# Altium PCB STM32F103_Blue_Pill_V_2.PcbDoc
Units mm, origin at the board's own origin, x right, y up, seen from the top; angles counter-clockwise.
Board outline 53.34 x 22.86 mm, 2 copper layers (Top Layer, Bottom Layer); 33 components, 50 nets, 164 pads, 28 vias.
Unrouted connection lines stored in the file: 25.
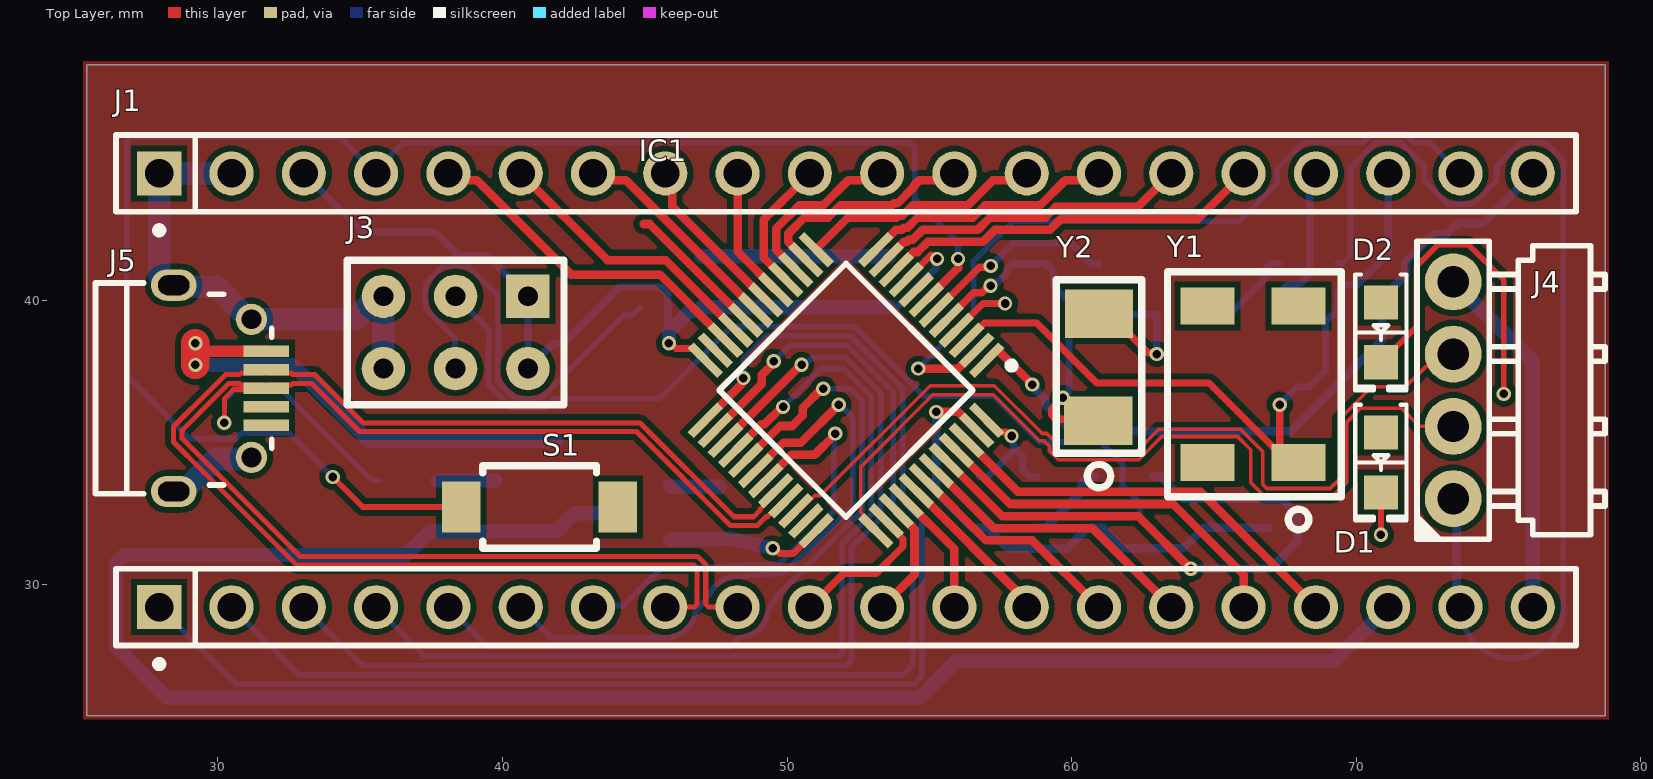
[diagram p0: Top Layer view]
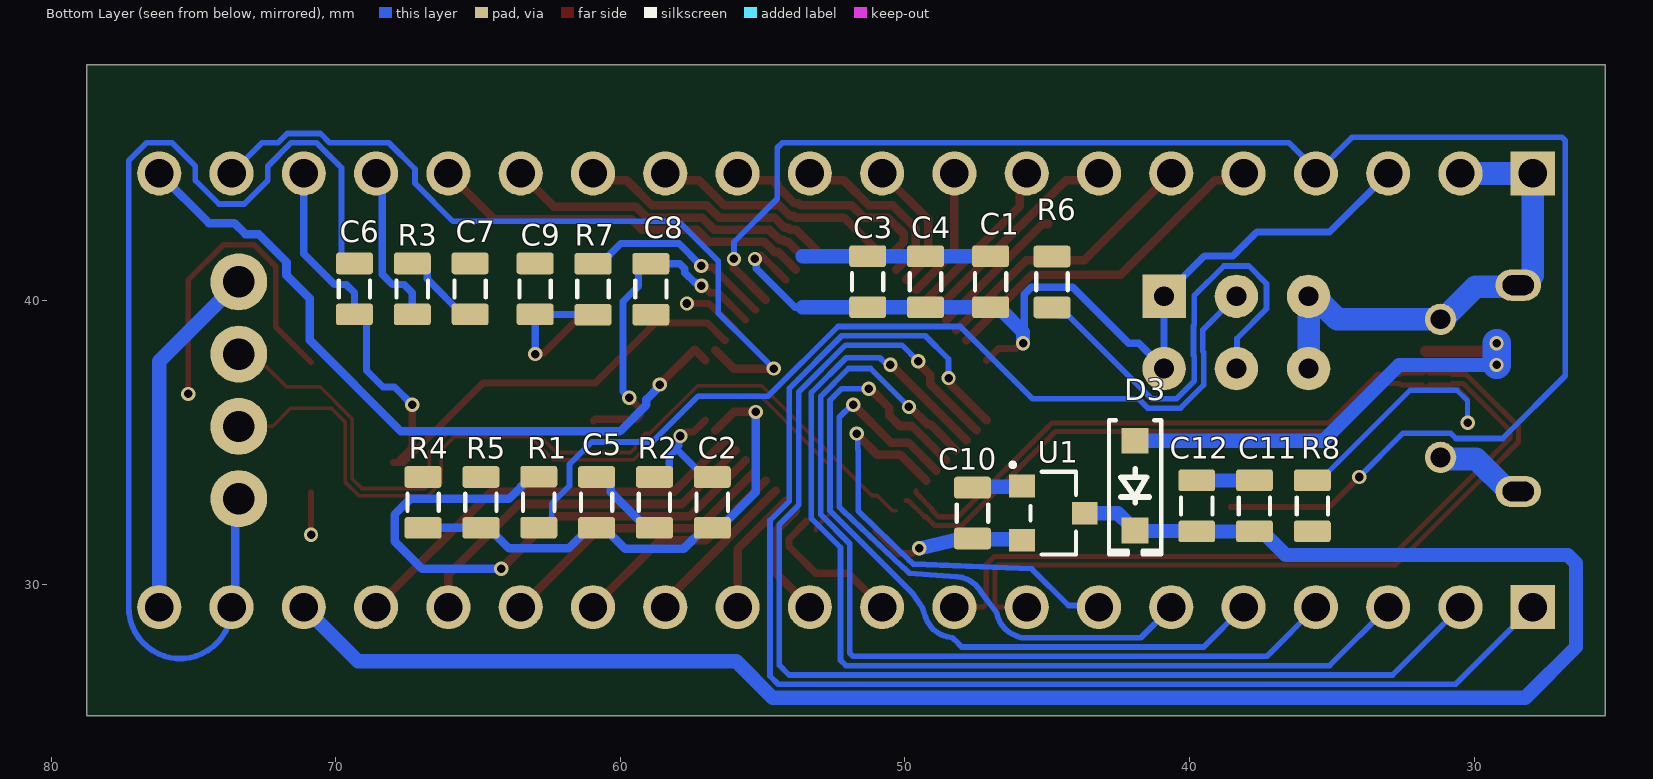
[diagram p1: Bottom Layer view, seen from below]
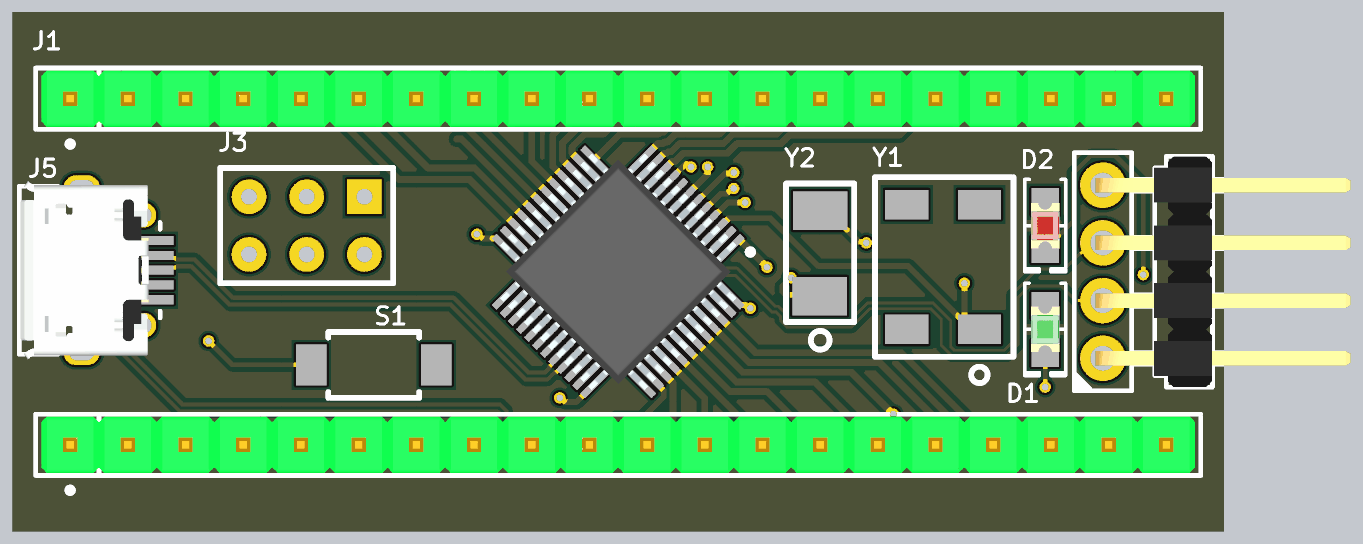
[diagram p2: 3D render of the assembled board from above, using the file's embedded part models]
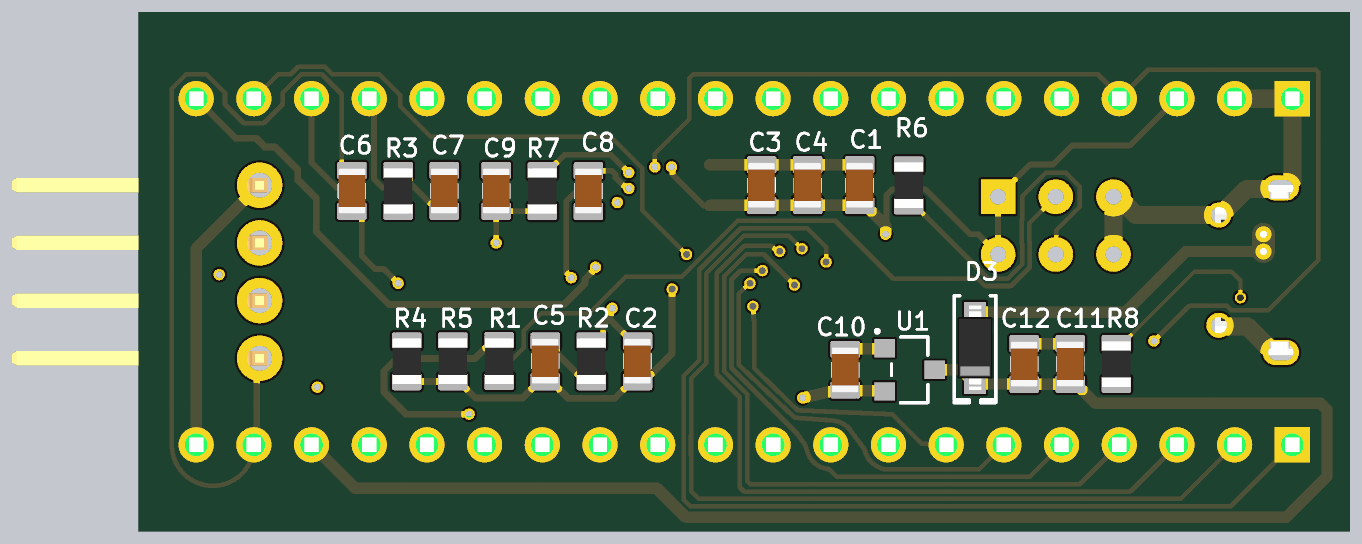
[diagram p3: 3D render of the assembled board from below, using the file's embedded part models]

## Layer stack, top to bottom
Top Solder: solder mask 0.0102, Solder Resist, Dk 3.5
Top Layer: signal copper 0.0356
Dielectric 1: dielectric 0.32, FR-4, Dk 4.8
Bottom Layer: signal copper 0.0356
Bottom Solder: solder mask 0.0102, Solder Resist, Dk 3.5

## Board outline
25.4,25.4 25.4,48.26 78.74,48.26 78.74,25.4

## Design rules (kind name [scope] priority, off if disabled: settings)
Clearance Clearance_1 [OnMid vs OnMid] p1: gap=0.2 ignorepadtopadclearanceinfootprint=FALSE except(0.127: Arc-Arc Arc-Track Arc-Text Track-Track Track-Text Text-Text) sourcerule=39 cellrowname=All cellrowtype=0 cellcolname=All cellcoltype=0 innerlayers=TRUE
Clearance Clearance_2 [(ExistsOnLayer('Top Layer') Or ExistsOnLayer('Bottom Layer')) vs (ExistsOnLayer('Top Layer') Or ExistsOnLayer('Bottom Layer'))] p2: gap=0.2 ignorepadtopadclearanceinfootprint=FALSE except(0.127: Arc-Arc Arc-Track Arc-Text Track-Track Track-Text Text-Text) sourcerule=39 cellrowname=All cellrowtype=0 cellcolname=All cellcoltype=0 outerlayers=TRUE
Clearance [All] p3: gap=0.254 ignorepadtopadclearanceinfootprint=FALSE ismatrix=TRUE
DiffPairsRouting DiffPair_90DiffPairsRouting [InDifferentialPair('USB_DiffPair_90')] p1: maxlimit=0.127 minlimit=0.127 mostfreqgap=0.127 toplayer_minwidth=0.178 toplayer_maxwidth=0.178 toplayer_prefwidth=0.178 bottomlayer_minwidth=0.178 bottomlayer_maxwidth=0.178 bottomlayer_prefwidth=0.178 impedanceprofiledriven=TRUE impedanceprofileid={32B7627D-B66E-4A8D-A1D5-BE67BC07B4AD} impedanceprofilevalue=90.000000 maxuncoupledlength=12.7
DiffPairsRouting [All] p2: maxlimit=0.254 minlimit=0.254 mostfreqgap=0.254 toplayer_minwidth=0.381 toplayer_maxwidth=0.381 toplayer_prefwidth=0.381 bottomlayer_minwidth=0.381 bottomlayer_maxwidth=0.381 bottomlayer_prefwidth=0.381 maxuncoupledlength=12.7
MatchedLengths DiffPair_90MatchedLengths [InDifferentialPair ('USB_DiffPair_90')] p1: tolerance=25.4 checknetsindiffpair=FALSE checkdiffpairvsdiffpair=TRUE checkxsignals=TRUE checkothers=TRUE
MinimumSolderMaskSliver [All] p1: minsoldermaskwidth=0.15
PlaneConnect [All] p1: planeconnectstyle=Direct reliefexpansion=0.508 reliefentries=4 reliefconductorwidth=0.254 reliefairgap=0.254
PolygonConnect [All] p1: connectstyle=Relief reliefconductorwidth=0.254 reliefentries=4 polygonreliefangle="90 Angle" airgapwidth=0.254
RoutingVias [All] p1: holewidth=0.711 width=1.27 viastyle="Through Hole" minholewidth=0.711 minwidth=1.27 maxholewidth=0.711 maxwidth=1.27
RoutingVias RoutingVia_JLCPCB [All] p2: holewidth=0.3 width=0.5 viastyle="Through Hole" minholewidth=0.3 minwidth=0.5 maxholewidth=6.3 maxwidth=6.5
SilkToSilkClearance [All] p1: silktosilkclearance=0.15
SilkToSolderMaskClearance [IsPad] p1: minsilkscreentomaskgap=0.15 clearancetoexposedcopper=TRUE
SolderMaskExpansion [All] p1: expansion=0.102 istentingtop=FALSE
UnRoutedNet [All] p1: checkbadconnections=TRUE
Width MaxMinWidth_JLCPCB [All] p1: maxlimit=10 minlimit=0.127 preferedwidth=0.2 minimp=50.000000 maximp=50.000000 favimp=50.000000
24 further rules are at their usual default settings.

## Classes and differential pairs
component class Controller_page: C1 C2 C3 C4 C5 C6 C7 C8 C9 C10 C11 C12 D1 D2 D3 IC1 R1 R2 R3 R4 R5 R6 R7 S1 U1 Y1 Y2
component class Connector_page: "  " J1 J3 J4 J5 R8
differential pair USB_DiffPair_90: +USB_D_P -USB_D_N

## Components (designator, comment, footprint, x,y, rotation, side; value= is the part's Value field where it differs from the comment)
C1 "Capacitor 4.7µF +/-40% 25V 0805" CAPC0805(2012)145_L 46.99,40.64 r270 bottom value=104
C2 "Capacitor 4.7µF +/-40% 25V 0805" CAPC0805(2012)145_L 56.769,32.893 r90 bottom value=1uF
C3 "Capacitor 4.7µF +/-40% 25V 0805" CAPC0805(2012)145_L 51.308,40.64 r270 bottom value=104
C4 "Capacitor 4.7µF +/-40% 25V 0805" CAPC0805(2012)145_L 49.276,40.64 r270 bottom value=104
C5 "Capacitor 4.7µF +/-40% 25V 0805" CAPC0805(2012)145_L 60.833,32.893 r90 bottom value=104
C6 "Capacitor 4.7µF +/-40% 25V 0805" CAPC0805(2012)145_L 69.342,40.386 r270 bottom value=15pF
C7 "Capacitor 4.7µF +/-40% 25V 0805" CAPC0805(2012)145_L 65.278,40.386 r270 bottom value=15pF
C8 "Capacitor 4.7µF +/-40% 25V 0805" CAPC0805(2012)145_L 58.928,40.386 r90 bottom value=15pF
C9 "Capacitor 4.7µF +/-40% 25V 0805" CAPC0805(2012)145_L 62.992,40.386 r270 bottom value=15pF
C10 "Capacitor 4.7µF +/-40% 25V 0805" CAPC0805(2012)145_L 47.625,32.512 r270 bottom value=0.1uF
C11 "Capacitor 4.7µF +/-40% 25V 0805" CAPC0805(2012)145_L 39.746,32.762 r270 bottom value=104
C12 "Capacitor 4.7µF +/-40% 25V 0805" CAPC0805(2012)145_L 37.719,32.766 r270 bottom value=104
D1 "Power Supply" "LED 0805_2012 GREEN" 70.866,34.29 r270 top value=Green
D2 "Test" "LED 0805_2012 RED" 70.866,38.862 r270 top value=Red
D3 "Zener 3V3" SOD-123 41.91,33.477 r270 bottom
IC1 "STM32F103C8T6XXX" QFP50P900X900X160-48N 52.07,36.83 r225 top
J1 "2-826646-0" FP-2-826646-0-MFG 52.07,44.45 r0 top
J3 "2x3P" "2x3P 2.54mm Pin Header -Footprint-1" 40.894,40.132 r180 top
J4 "M20-9960445" "HARWIN M20-9960445" 73.406,36.83 r90 top
J5 "MICROXNJ USB 2.0" "USB 2.0 Tupe B Micro" 28.498,36.899 r90 top
R1 "470R5J" RESC0805(2012)_L 62.865,32.893 r270 bottom value=10K
R2 "470R5J" RESC0805(2012)_L 58.801,32.893 r90 bottom value=10K
R3 "470R5J" RESC0805(2012)_L 67.31,40.386 r270 bottom value=47
R4 "470R5J" RESC0805(2012)_L 66.929,32.893 r90 bottom value=1K
R5 "470R5J" RESC0805(2012)_L 64.897,32.893 r90 bottom value=1K
R6 "470R5J" RESC0805(2012)_L 44.831,40.64 r90 bottom value=10K
R7 "470R5J" RESC0805(2012)_L 60.96,40.386 r90 bottom value=47
R8 "470R5J" RESC0805(2012)_L 35.687,32.766 r270 bottom value=1.5K
S1 "TS-1088-AR02016" TS-1088-AR02016-Footprint-1 41.306,32.729 r180 top
U1 "XC6206P332MR" XC6206P332MR-Footprint-1 44.788,32.512 r270 bottom
Y1 "MC-30632.7680K-A0:ROHS" MC-30632.7680K-A0:ROHS-Footprint-1 67.97,34.29 r90 top
Y2 "X50328MSB2GI" X50328MSB2GI-Footprint-1 60.96,35.814 r90 top
? "2-826646-0" FP-2-826646-0-MFG 52.07,29.21 r0 top

## Footprints (in the part's own frame and the unit in brackets; to place one, negate y for a bottom-side part, rotate by r counter-clockwise, add the part's x,y. Pads: shape width x height; smd on the part's side, far side on the other; paste and mask are expansions set on the pad)
"2x3P 2.54mm Pin Header -Footprint-1" [mil]
  rect 60x60 hole 27.56: 1(0,0)
  round 60 hole 27.56: 2(0,100) 3(100,0) 4(100,100) 5(200,0) 6(200,100)
  silkscreen extent -50,-50 250,150
CAPC0805(2012)145_L [mm] "Chip Capacitor, Body 2.0x1.2mm, Height 1.45mm, IPC High Density"
  rrect25% 0.76x1.3 smd: 1(-0.9,0) 2(0.89,0)
  silkscreen extent -0.3,-0.55 0.3,0.55, body extent -1,-0.6 1,0.6, height 1.45
FP-2-826646-0-MFG [mm]
  rect 1.55x1.55 hole 1 paste-2539.97 mask+0: 1(-24.13,0)
  round 1.55 hole 1 paste-2539.97 mask+0: 2(-21.59,0) 3(-19.05,0) 4(-16.51,0) 5(-13.97,0) 6(-11.43,0) 7(-8.89,0) 8(-6.35,0) 9(-3.81,0) 10(-1.27,0) 11(1.27,0) 12(3.81,0) 13(6.35,0) 14(8.89,0) 15(11.43,0) 16(13.97,0) 17(16.51,0) 18(19.05,0) 19(21.59,0) 20(24.13,0)
  silkscreen extent -25.65,-2.12 25.65,1.35, body extent -25.75,-1.45 25.75,1.45, height 0.25
"HARWIN M20-9960445" [mm] "2.54mm DIL PC TAIL PIN HEADER ASSEMBLY"
  round 2 hole 1.1: 1(-3.81,0) 2(-1.27,0) 3(1.27,0) 4(3.81,0)
  silkscreen extent -5.24,-5.33 5.24,1.3, body extent -5.08,-10.9 5.08,0.32, height 2.54
"LED 0805_2012 GREEN" [mm] "Chip Diode, 2-Leads, Body 2.00x1.25mm, IPC Medium Density"
  rect 1.2x1.2 smd: 1(-1.05,0) 2(1.05,0)
  silkscreen extent -2.03,-0.9 2.03,0.9, body extent -1,-0.63 1,0.63, height 0.9
"LED 0805_2012 RED" [mm] "Chip Diode, 2-Leads, Body 2.00x1.25mm, IPC Medium Density"
  rect 1.2x1.2 smd: 1(-1.05,0) 2(1.05,0)
  silkscreen extent -2.03,-0.9 2.03,0.9, body extent -1,-0.63 1,0.63, height 0.9
MC-30632.7680K-A0:ROHS-Footprint-1 [mm]
  rect 1.3x1.9 smd: 1(0,0) 2(5.5,0) 3(5.5,3.2) 4(0,3.2)
  silkscreen extent -2.36,-1.5 6.7,4.6, body extent -1,-1.3 6.5,4.4, height 1.2
QFP50P900X900X160-48N [mm]
  rect 1.475x0.3 smd: 1(-4.238,2.75) 2(-4.238,2.25) 3(-4.238,1.75) 4(-4.238,1.25) 5(-4.238,0.75) 6(-4.238,0.25) 7(-4.238,-0.25) 8(-4.238,-0.75) 9(-4.238,-1.25) 10(-4.238,-1.75) 11(-4.238,-2.25) 12(-4.238,-2.75) 25(4.238,-2.75) 26(4.238,-2.25) 27(4.238,-1.75) 28(4.238,-1.25) 29(4.238,-0.75) 30(4.238,-0.25) 31(4.238,0.25) 32(4.238,0.75) 33(4.238,1.25) 34(4.238,1.75) 35(4.238,2.25) 36(4.238,2.75)
  rect 0.3x1.475 smd: 13(-2.75,-4.238) 14(-2.25,-4.238) 15(-1.75,-4.238) 16(-1.25,-4.238) 17(-0.75,-4.238) 18(-0.25,-4.238) 19(0.25,-4.238) 20(0.75,-4.238) 21(1.25,-4.238) 22(1.75,-4.238) 23(2.25,-4.238) 24(2.75,-4.238) 37(2.75,4.238) 38(2.25,4.238) 39(1.75,4.238) 40(1.25,4.238) 41(0.75,4.238) 42(0.25,4.238) 43(-0.25,4.238) 44(-0.75,4.238) 45(-1.25,4.238) 46(-1.75,4.238) 47(-2.25,4.238) 48(-2.75,4.238)
  silkscreen extent -4.85,-3.15 3.15,3.62, body extent -4.5,-4.5 4.5,4.5, height 1.6
RESC0805(2012)_L [mm] "Chip Resistor, Body 2.0x1.3mm, IPC High Density"
  rrect25% 0.76x1.3 smd: 1(-0.9,0) 2(0.89,0)
  silkscreen extent -0.3,-0.55 0.3,0.55, body extent -1,-0.62 1,0.63, height 0.6
SOD-123 [mm] "SOD, 2-Leads, Body 1.55x3.70mm, IPC Medium Density"
  rect 0.9x0.95 smd: 1(-1.575,0) 2(1.575,0)
  silkscreen extent -2.3,-0.92 2.41,0.92, body extent -1.86,-0.78 1.86,0.77, height 1.35
TS-1088-AR02016-Footprint-1 [mm]
  rect 1.35x1.8 smd: 1(-2.75,0) 2(2.75,0)
  silkscreen extent -2,-1.45 2,1.45, body extent -2,-1.5 2,1.44, height 2.5
"USB 2.0 Tupe B Micro" [mm] "USB 2.0 Type B Micro"
  rect 0.4x1.6 smd: 1(1.3,-3.2) 2(0.65,-3.2) 3(0,-3.2) 4(-0.65,-3.2) 5(-1.3,-3.2)
  round 1.1 hole 0.7: 6(-2.425,-2.68) 9(2.425,-2.68)
  oval 1.1x1.6 hole 0.7 slot 1.1 at 90 deg: 7(-3.625,0.05) 8(3.625,0.05)
  silkscreen extent -3.7,-3.4 3.7,2.8, body extent -3.93,-2.9 3.93,2.76, height 2.78
X50328MSB2GI-Footprint-1 [mm]
  rect 1.7x2.4 smd: 1(-0.056,0.022) 2(3.7,0)
  silkscreen extent -2.41,-1.5 4.9,1.5, body extent -1.2,-1.5 4.9,1.5, height 1.2
XC6206P332MR-Footprint-1 [mm]
  rect 0.8x0.9 smd: 1(-0.95,-1.1) 2(0.95,-1.1) 3(0,1.1)
  silkscreen extent -1.77,-1.5 1.45,0.8, body extent -1.45,-0.82 1.45,0.8, height 1.2

## Part data
C1 C2 C3 C4 C5 C6 C7 C8 C9 C10 C11 C12: library part CMP-001-00080-4, "Chip Capacitor, 4.7µF +/-40%, 25V, 0805, Thickness 1.45 mm", Case/Package=0805, Max Operating Temperature=85°C, Min Operating Temperature=-55°C, Tolerance=20%, Voltage Rating=25V, Mounting Technology=SMT, Pins=2
D1: library part APHCM2012CGCK-F01, "LED GREEN CLEAR CHIP SMD", Color=Green, Current - Test=20mA, Device Package="0805 (2012 Metric)", Lens Color=Colorless, Manufacturer=Kingbright, Millicandela Rating=50mcd, Supplier Device Package="Chip LED", Supplier Part Number 1=754-1094-1-ND, Voltage - Forward (Vf) (Typ)=2.1V, ComponentLink1Description=Datasheet, ComponentLink1URL=http://www.kingbrightusa.com/images/catalog/SPEC/APHCM2012CGCK-F01.pdf, ComponentLink2Description="DigiKey Link", ComponentLink2URL=https://www.digikey.com/en/products/detail/kingbright/APHCM2012CGCK-F01/1747492, Configuration=Standard, Height (Max)=0.40mm, LastUpdated="3/11/2024 7:52:47 AM", Lens Size="1.30mm x 1.25mm", Lens Style="Rectangle with Flat Top", Lens Transparency=Clear, Lifecycle Status=Active, Minimum Order=1, Mounting Type="Surface Mount", Package / Case="0805 (2012 Metric)", Packaging=TapeAndReel, Part Number=APHCM2012CGCK-F01, Part Status=Active, PartId=241, Price=0.05, Series=-, Size / Dimension="2.00mm L x 1.25mm W", Supplier 1=DigiKey, Viewing Angle=110°, Wavelength - Dominant=570nm, Wavelength - Peak=574nm
D2: library part LTST-C170KAKT, "LED RED CLEAR SMD", Color=Red, Current - Test=20mA, Device Package="0805 (2012 Metric)", Lens Color=Colorless, Manufacturer="Lite-On Inc.", Millicandela Rating=54mcd, Supplier Part Number 1=160-1412-1-ND, Voltage - Forward (Vf) (Typ)=2V, ComponentLink1Description=Datasheet, ComponentLink1URL=http://optoelectronics.liteon.com/upload/download/DS-22-99-0182/LTST-C170KAKT.pdf, ComponentLink2Description="DigiKey Link", ComponentLink2URL=http://digikey.com/product-detail/en/lite-on-inc/LTST-C170KAKT/160-1412-1-ND/386772, Configuration=Standard, Height (Max)=1.10mm, LastUpdated="3/11/2024 7:52:22 AM", Lens Size="1.40mm x 1.25mm", Lens Style="Rectangle with Flat Top", Lens Transparency=Clear, Lifecycle Status=Active, Minimum Order=1, Mounting Type="Surface Mount", Package / Case="0805 (2012 Metric)", Packaging=TapeAndReel, Part Number=LTST-C170KAKT, Part Status=Active, PartId=305, Price=0.07, Series=-, Size / Dimension="2.00mm L x 1.25mm W", Supplier 1=DigiKey, Viewing Angle=130°, Wavelength - Dominant=615nm, Wavelength - Peak=621nm
D3: library part BZT52C3V3-HE3-18, "DIODE ZENER 3.3V 410MW SOD123", Manufacturer="Vishay Semiconductor Diodes Division", Operating Temperature="-55°C ~ 150°C", Package / Case=SOD-123, Power - Max=410mW, Supplier Part Number 1=BZT52C3V3-HE3-18GICT-ND, Tolerance=±5%, Voltage - Zener (Nom) (Vz)=3.3V, ComponentLink1Description=Datasheet, ComponentLink1URL=http://www.vishay.com/docs/85760/bzt52.pdf, ComponentLink2Description="DigiKey Link", ComponentLink2URL=http://digikey.com/product-detail/en/vishay-semiconductor-diodes-division/BZT52C3V3-HE3-18/BZT52C3V3-HE3-18GICT-ND/7717359, Impedance (Max) (Zzt)="80 Ohms", LastUpdated="3/11/2024 7:47:45 AM", Lifecycle Status=Active, Minimum Order=1, Mounting Type="Surface Mount", Packaging=TapeAndReel, Part Number=BZT52C3V3-HE3-18, Part Status=Active, PartId=1614, Price=0.04, Series="Automotive, AEC-Q101", Supplier 1=DigiKey, Supplier Device Package=SOD-123
IC1: "Integrated Circuit", Manufacturer_Name=ST, Height=1.6mm, Manufacturer_Part_Number=STM32F103C8T6XXX
J1 ?: library part CMP-03369-000139-1, "CONN HEADER VERT 20POS 2.54MM", Color=Green, Current Rating=3A, Flammability Rating="UL94 V-0", High Temperature Housing=No, Max Operating Temperature=105°C, Min Operating Temperature=-65°C, Package Quantity=300, Board Standoff="No (Without)", Connector Type=Plug, Contact Gender=Male, Contact Material=Bronze, Contact Mating Length=5.8mm, Contact Plating=Gold, Contact Post Length=0.1259inch, Contact Protection="No (Without)", Contact Shape=Square, Contact Type="Male Pin", Depth=2.5mm, ELV=Compliant, Gasket="No (Without)", High Speed Serial Data Connector=No, Housing Color=Green, Housing Material=PBT, Keyed=No, Length=50.8mm, Mating Alignment="No (Without)", Mating Connector Lock="No (Without)", Mount="Straddle Mount", Number of Contacts=20, Number of Positions=20, Number of Rows=1, Orientation=Straight, Packaging=Carton, PCB Mount Retention=Without, PCB Mounting Orientation=Vertical, Pitch=2.54mm, Plating Thickness=0.8um, Radiation Hardening=No, RoHS Compliant=Yes, Row Spacing=2.54mm, Selectively Loaded="No (Without)", Series="AMPMODU MOD II", Stabilizers="No (Without)", Strain Relief="No (Without)", Termination="Through Hole"
J3: library part CMP-002-00390-1, "PZ254-2-03-Z-8.5", Case/Package="Plugin, P=2.54mm", Max Current Rating=3A, Connector Type="Pin Header", Gender=Male, Mounting Technology=TH, Pins=6, RoHS Compliant=Yes
J4: "CONN HEADER R/A 4POS 2.54MM", Current Rating (Amps)="3A per Contact", Insulation Color=Black, Manufacturer="Harwin Inc.", Material Flammability Rating="UL94 V-0", Operating Temperature="-40°C ~ 105°C", Supplier Part Number 1=952-3286-ND, ComponentLink1Description=Datasheet, ComponentLink1URL=https://cdn.harwin.com/pdfs/Harwin_PC_Connectors_M20.pdf, ComponentLink2Description="DigiKey Link", ComponentLink2URL=https://www.digikey.com/en/products/detail/harwin-inc/M20-9960445/3921052, Connector Type="Header, Cuttable", Contact Finish - Mating=Gold, Contact Length - Mating="0.240\" (6.10mm)", Contact Length - Post="0.118\" (3.00mm)", Contact Material=Brass, Contact Shape=Square, Contact Type="Male Pin", Fastening Type=Push-Pull, Insulation Height="0.100\" (2.54mm)", Insulation Material="Polyamide (PA6T), Nylon 6T", LastUpdated="9/21/2022 7:23:20 PM", Lifecycle Status=Active, Minimum Order=1, Mounting Type="Through Hole, Right Angle", Number of Positions=4, Number of Positions Loaded=All, Number of Rows=1, Packaging=Bulk, Part Number=M20-9960445, Part Status=Active, PartId=167, Pitch - Mating="0.100\" (2.54mm)", Price=0.11, Row Spacing - Mating="-40°C ~ 105°C", Series=M20, Shrouding=Unshrouded, Style="Board to Board or Cable", Supplier 1=DigiKey, Termination=Solder
J5: library part CMP-002-00071-9, "1A USB 2.0 1 Surface Mount 5P Female -20℃~+85℃ Micro-B SMD USB Connectors ROHS", Case/Package="USB 2.0", Max Current Rating=1A, Max Operating Temperature=85°C, Min Operating Temperature=-25°C, Connector Type=Micro-B, Gender=Female, Mounting Technology=SMD, Pins=9, RoHS Compliant=Yes
R1 R2 R3 R4 R5 R6 R7 R8: library part CMP-009-00102-2, "470R 0.125W 5% 0805 (2012 Metric)  SMD", Case/Package=0805, Power=125mW, Tolerance=5%, Mounting Technology=SMT, Pins=2
S1: library part CMP-011-00069-3, "NO 50mA 100MΩ 100000 Times 12V 160gf@±50gf Brick nogging SPST SMD Tactile Switches ROHS", Case/Package=SMD, Current Rating=50mA, Voltage Rating=12V, Pins=2, RoHS Compliant=Yes, Throw Configuration=SPST
U1: library part CMP-019-00049-3, "200mA Fixed 3.3V Positive 6V SOT-23-3L Linear Voltage Regulators (LDO) ROHS", Case/Package=SOT-23-3L, Dropout Voltage=680mV, Output Current=200mA, Output Voltage=3.3V, Pins=3
Y1: library part CMP-003-00031-11, "32.768 kHz ±20ppm Crystal 12.5pF 50 kOhms 4-SOJ, 5.50mm pitch", Case/Package="4-SOJ 5.50mm pitch", Frequency=32.768kHz, Load Capacitance=12.5pF, Max Operating Temperature=85°C, Min Operating Temperature=-40°C, ESR=50k, Mounting Technology="PARALLEL - FUNDAMENTAL", Pins=4, RoHS Compliant=Yes
Y2: library part CMP-003-00032-3, "8MHz 20pF ±10ppm SMD5032-2P Crystals ROHS", Case/Package=SMD5032-2P, Frequency=8MHz, Load Capacitance=20pF, Max Operating Temperature=125°C, Min Operating Temperature=-40°C, ESR=80, Mounting Technology=SMD, Pins=2, RoHS Compliant=Yes

## Via types
v1: diameter 0.5, hole 0.3, Top Layer to Bottom Layer, 28 vias

## Nets (pads, with @x,y where several pads share a name; then routed paths per layer and width w, separated by ;. In a path a pad name is that pad's centre, name@x,y a point inside that pad or via, vN(x,y) a via of type N, cw(c..) or ccw(c..) an arc to the next point about the centre after c; other vN are vias at no path point)
+3V3: ?.20 C1.2 C2.2 C3.2 C4.2 C10.2 D1.1 D2.1 IC1.9 IC1.24 IC1.36 IC1.48 J1.3 J3.1 J3.2 J4.4 R2.2 R8.2 U1.2 | length 57.2
  Top Layer w0.254: v1(45.847,38.481) 45.914,38.481 46.097,38.298 46.713,38.298 IC1.24 ; v1(49.495,31.277) 49.562,31.277 49.741,31.098 50.227,31.098 IC1.36 ; IC1.9 55.056,41.584 55.064,41.584 55.204,41.444 v1(55.27,41.444) ; IC1.48 57.427,35.362 57.681,35.362 57.82,35.223 v1(57.887,35.223)
  Bottom Layer w0.254: J1.3 35.077,42.393 37.634,42.393 38.478,41.548 39.478,41.548 J3.1 J3.2 41.783,38.481 42.135,38.481 44.101,40.447 45.561,40.447 45.808,40.2 45.808,38.52 v1(45.847,38.481) ; 53.594,39.75 53.864,39.75 55.223,41.109 55.223,41.397 v1(55.27,41.444) ; C2.2 57.039,33.783 58.039,34.783 ; v1(57.887,35.223) 57.934,35.176 57.934,34.888 58.039,34.783 ; R2.2 58.531,33.783 58.278,34.036 58.278,34.492 58.039,34.731 58.039,34.783
  Bottom Layer w0.5: v1(45.847,38.481) 45.847,38.877 46.59,39.62 46.86,39.62 C1.2 C4.2 C3.2 53.594,39.75 ; U1.2 45.918,31.592 47.595,31.592 C10.2 48.025,31.615 v1(49.495,31.277) ; J4.4 76.2,37.846 ?.20
+5V: ?.18 C11.2 C12.2 D3.2 U1.3 | length 67.7
  Bottom Layer w0.5: C12.2@37.719,31.872 C11.2 39.761,31.887 41.895,31.887 D3.2 41.935,31.902 42.135,32.102 42.135,32.127 42.52,32.512 U1.3 ; C12.2 37.449,31.876 36.619,31.046 26.709,31.046 26.416,30.753 26.416,27.813 28.206,26.023 54.647,26.023 55.929,27.305 69.215,27.305 ?.18
BOOT0: J3.3 R1.2 | length 32.2
  Bottom Layer w0.2: J3.3 39.531,38.955 39.531,38.193 39.505,38.167 39.505,37.017 40.319,36.203 41.469,36.203 41.796,36.53 45.515,36.53 48.055,39.07 52.354,39.07 54.806,36.618 57.27,36.618 58.879,35.009 61.006,35.009 61.783,34.232 61.783,33.476 62.41,32.849 62.41,32.283 62.69,32.003 R1.2
BOOT1: J3.4 R6.1 | length 16.3
  Bottom Layer w0.2: J3.4 38.33,37.616 38.33,38.654 37.292,39.692 37.292,40.572 37.914,41.194 38.794,41.194 39.832,40.156 39.832,39.12 39.858,39.094 39.858,38.058 39.832,38.032 39.832,37.152 40.454,36.53 41.334,36.53 44.264,39.46 44.551,39.46 R6.1
GND: ?.19 C1.1 C2.1 C3.1 C4.1 C5.1 C6.1 C7.1 C8.1 C9.1 C10.1 C11.1 C12.1 IC1.8 IC1.23 IC1.35 IC1.47 J1.1 J1.2 J3.5 J3.6 J4.1 J5.5 J5.6 J5.7 J5.8 J5.9 R4.1 R5.1 S1.1 U1.1 | length 88.5
  Top Layer w0.3: v1(55.245,36.068) 56.014,36.068 IC1.47
  Bottom Layer w0.2: C6.1 69.517,41.286 69.797,41.566 69.797,44.647 70.675,45.525 71.565,45.525 72.39,44.7 72.39,44.2 73.215,43.375 74.105,43.375 74.93,44.2 74.93,44.7 75.755,45.525 76.645,45.525 77.275,44.895 77.275,29.21 cw(c75.467,29.21) ?.19 ?.19@73.533,29.337 ; J4.1 J4.1@73.469,32.956
  Bottom Layer w0.3: v1(55.245,36.068) 55.245,33.247 56.499,31.993 C2.1 57.039,31.993 57.769,31.263 59.833,31.263 60.563,31.993 C5.1 61.103,31.993 61.823,31.273 63.907,31.273 64.627,31.993 R5.1 R4.1 ; J4.1 73.533,32.893 ?.19@73.533,29.337
  Bottom Layer w0.5: C12.1@37.714,33.662 C11.1 ; U1.1 45.913,33.437 47.6,33.437 C10.1 ; C1.1 C4.1 C3.1 53.594,41.54
  Bottom Layer w0.8: J5.7 28.779,33.274 29.922,34.417 31.121,34.417 J5.6 ; J1.2 J1.1 27.94,40.863 28.279,40.524 J5.8 28.505,40.467 29.954,40.467 31.097,39.324 J5.9 34.81,39.324 35.618,40.132 J3.5 J3.6
NetC7_2: C7.2 R3.1 Y1.2 | length 2.9
  Bottom Layer w0.254: C7.2 65.548,39.496 66.787,40.735 66.787,41.033 67.04,41.286 R3.1
NetC9_2: C9.2 R7.1 Y2.2 | length 6
  Top Layer w0.254: Y2.2 61.31,39.514 62.677,38.147 62.945,38.147 v1(62.992,38.1)
  Bottom Layer w0.254: R7.1 60.965,39.491 62.987,39.491 C9.2 v1(62.992,38.1)
NetD1_2: D1.2 R4.2 | length 1.5
  Top Layer w0.2: v1(70.866,31.75) D1.2
NetD2_2: D2.2 R5.2 | length 11.8
  Top Layer w0.2: D2.2 72.106,39.052 72.106,41.178 72.868,41.94 73.944,41.94 75.184,40.7 v1(75.184,36.703)
NetIC1_20: IC1.20 R6.2 | length 5
  Top Layer w0.3: 44.958,42.672 45.167,42.672 IC1.20
NetIC1_44: IC1.44 R1.1 | length 21
  Top Layer w0.3: IC1.44 57.554,32.407 62.335,32.407 v1(64.182,30.56) v1@64.262,30.48
  Bottom Layer w0.3: R1.1 63.135,33.793 63.915,33.013 67.379,33.013 67.929,32.462 67.929,31.524 66.965,30.56 v1(64.182,30.56)
NRST: C5.2 IC1.7 J1.4 R2.1 S1.2 | length 60.3
  Top Layer w0.2: v1(34.036,33.782) 35.089,32.729 S1.2
  Top Layer w0.3: IC1.7 56.007,41.121 v1(56.007,41.444)
  Bottom Layer w0.2: v1(34.036,33.782) 32.494,35.324 30.826,35.324 30.639,35.137 28.998,35.137 26.797,37.338 26.797,45.603 26.914,45.72 34.29,45.72 J1.4 35.56,44.577 36.508,45.525 54.307,45.525 54.483,45.349 54.483,43.561 56.007,42.037 v1(56.007,41.444)
  Bottom Layer w0.3: R2.1 59.071,31.993 60.333,33.255 60.333,33.553 60.563,33.783 C5.2
PA0-WKUP: IC1.10 J1.16 | length 13.6
  Top Layer w0.3: IC1.10 54.453,41.688 54.585,41.688 54.94,42.044 56.877,42.044 57.304,42.471 59.24,42.471 59.614,42.845 64.435,42.845 J1.16
PA1: IC1.11 J1.15 | length 11.3
  Top Layer w0.3: IC1.11 54.102,42.044 54.205,42.044 54.276,42.115 54.408,42.115 54.764,42.471 56.7,42.471 57.127,42.898 59.063,42.898 59.437,43.272 62.322,43.272 J1.15
PA2: IC1.12 J1.14 | length 8.9
  Top Layer w0.3: IC1.12 53.822,42.471 54.028,42.471 54.1,42.542 54.231,42.542 54.587,42.898 56.523,42.898 56.95,43.325 58.886,43.325 59.772,44.211 60.721,44.211 J1.14
PA3: IC1.13 J1.13 | length 8.5
  Top Layer w0.3: IC1.13 52.145,42.898 53.852,42.898 53.923,42.969 54.054,42.969 54.41,43.325 56.346,43.325 57.232,44.211 58.181,44.211 J1.13
PA4: IC1.14 J1.12 | length 7.9
  Top Layer w0.3: IC1.14 50.04,42.042 50.04,42.332 50.607,42.898 51.443,42.898 51.87,43.325 53.675,43.325 53.746,43.396 53.877,43.396 54.465,43.984 54.465,44.035 54.641,44.211 55.641,44.211 J1.12
PA5: IC1.15 J1.11 | length 6.3
  Top Layer w0.3: IC1.15 49.613,41.762 49.613,42.509 50.43,43.325 51.266,43.325 52.152,44.211 53.101,44.211 J1.11
PA6: IC1.16 J1.10 | length 4.7
  Top Layer w0.3: IC1.16 49.186,41.481 49.186,42.836 J1.10
PA7: IC1.17 J1.9 | length 4.6
  Top Layer w0.3: J1.9 48.26,41.701 IC1.17
PA8: ?.5 IC1.29 | length 26.6
  Top Layer w0.3: IC1.29 49.754,35.575 50.18,35.575 50.546,35.941 50.546,36.209 51.218,36.881 v1(51.272,36.881)
  Bottom Layer w0.2: ?.5 39.502,27.808 48.001,27.808 48.28,28.087 48.33,28.137 ccw(c48.26,29.21) 49.277,28.862 49.391,29.196 49.41,29.228 49.734,29.698 52.632,32.596 52.632,36.48 52.231,36.881 v1(51.272,36.881)
PA9: ?.6 IC1.30 | length 21.7
  Top Layer w0.3: IC1.30 49.878,34.991 50.485,34.991 v1(51.816,36.322)
  Bottom Layer w0.2: ?.6 41.715,28.135 45.835,28.135 45.9,28.135 46.07,28.194 ccw(c45.72,29.21) 46.776,29.011 47.347,29.778 47.401,29.864 47.471,29.94 cw(c48.26,29.21) 47.541,30.009 cw(c48.26,29.21) 48.152,30.28 cw(c48.26,29.21) 48.182,30.282 49.843,30.403 49.908,30.469 cw(c51.156,29.228) 50.078,30.619 52.188,32.614 52.305,32.731 52.305,35.881 51.864,36.322 v1(51.816,36.322)
PA10: ?.7 IC1.31 | length 15.6
  Top Layer w0.3: IC1.31 50.158,34.564 50.975,34.564 51.689,35.278 v1(51.689,35.306)
  Bottom Layer w0.2: ?.7 43.235,29.265 44.255,29.265 45.543,30.553 49.703,30.727 cw(c51.156,29.228) 49.863,30.866 51.578,32.53 51.639,32.591 51.639,34.733 51.662,34.756 51.662,35.279 v1(51.689,35.306)
PA15: ?.10 IC1.38 | length 5.3
  Top Layer w0.25: ?.10 51.989,30.399 53.135,30.399 54.075,31.339 54.075,31.608 53.476,32.207 IC1.38
PB0: IC1.18 J1.8 | length 5.9
  Top Layer w0.3: J1.8 45.959,44.211 45.959,43.294 IC1.18
PB1: IC1.19 J1.7 | length 7.7
  Top Layer w0.3: J1.7 43.419,44.211 44.336,44.211 IC1.19
PB3: ?.11 IC1.39 | length 4.1
  Top Layer w0.3: ?.11 54.477,30.347 54.477,31.948 IC1.39
PB4: ?.12 IC1.40 | length 4.4
  Top Layer w0.3: IC1.40 55.88,31.252 ?.12
PB5: ?.13 IC1.41 | length 5.7
  Top Layer w0.3: IC1.41 58.42,29.419 ?.13
PB6: ?.14 IC1.42 | length 7.9
  Top Layer w0.3: IC1.42 56.994,31.553 58.617,31.553 ?.14
PB7: ?.15 IC1.43 | length 10.2
  Top Layer w0.3: IC1.43 57.274,31.98 60.73,31.98 ?.15
PB8: ?.16 IC1.45 | length 13
  Top Layer w0.3: IC1.45 57.834,32.834 63.559,32.834 66.04,30.353 ?.16
PB9: ?.17 IC1.46 | length 14.7
  Top Layer w0.3: IC1.46 58.114,33.261 64.529,33.261 ?.17
PB10: IC1.21 J1.6 | length 9.8
  Top Layer w0.3: J1.6 43.688,41.402 45.73,41.402 IC1.21
PB11: IC1.22 J1.5 | length 12.2
  Top Layer w0.3: J1.5 38.339,44.211 39.101,44.211 42.418,40.894 45.531,40.894 IC1.22
PB12: ?.1 IC1.25 | length 47.8
  Top Layer w0.3: IC1.25 48.429,37.078 48.429,37.219 v1(48.467,37.258)
  Bottom Layer w0.2: ?.1 30.65,26.5 54.45,26.5 54.737,26.787 54.737,28.624 54.742,28.629 54.742,29.791 54.737,29.796 54.737,32.258 54.06,32.935 54.06,36.902 52.219,38.743 49.284,38.743 48.467,37.926 v1(48.467,37.258)
PB13: ?.2 IC1.26 | length 43.3
  Top Layer w0.3: IC1.26 49.116,37.058 49.116,37.378 49.53,37.792 v1(49.53,37.846)
  Bottom Layer w0.2: ?.2 32.863,26.827 54.069,26.827 54.41,27.168 54.41,28.76 54.415,28.765 54.415,29.655 54.41,29.66 54.41,32.123 53.733,32.8 53.733,36.766 52.083,38.416 50.1,38.416 v1(49.53,37.846)
PB14: ?.3 IC1.27 | length 37.2
  Top Layer w0.3: IC1.27 50.494,37.729 v1(50.51,37.729)
  Bottom Layer w0.2: ?.3 35.076,27.154 52.073,27.154 52.265,27.346 52.265,31.304 53.286,32.325 53.286,36.751 52.064,37.973 50.882,37.973 50.695,37.786 50.568,37.786 v1(50.51,37.729)
PB15: ?.4 IC1.28 | length 32.9
  Top Layer w0.3: IC1.28 49.112,35.64 49.215,35.64 49.822,36.246 v1(49.86,36.246)
  Bottom Layer w0.2: ?.4 37.289,27.481 51.821,27.481 51.938,27.598 51.938,31.439 52.959,32.46 52.959,36.615 51.982,37.592 51.206,37.592 v1(49.86,36.246)
PC13: IC1.2 J1.19 | length 26.7
  Top Layer w0.3: v1(54.61,37.592) 56.014,37.592 IC1.2
  Bottom Layer w0.2: v1(54.61,37.592) 56.557,39.539 56.557,41.377 57.945,42.764 65.875,42.764 67.212,44.102 67.212,44.603 68.135,45.525 70.212,45.525 70.539,45.852 71.701,45.852 72.028,45.525 72.585,45.525 J1.19
SWCLK: IC1.37 J4.2 | length 30
  Top Layer w0.127: IC1.37 53.122,32.011 52.585,32.549 52.585,34.134 55.12,36.669 57.245,36.669 58.856,35.058 59.021,35.058 59.22,34.858 59.22,34.694 59.523,34.391 62.352,34.391 63.165,35.204 65.829,35.204 66.292,34.74 66.292,33.586 66.756,33.122 69.184,33.122 69.671,33.609 69.671,35.717 70.157,36.204 71.575,36.204 72.215,35.563 73.403,35.563 J4.2
SWDIO: IC1.34 J4.3 | length 31.1
  Top Layer w0.127: IC1.34 50.433,32.596 50.901,33.064 50.971,33.133 51.167,33.133 55.025,36.991 57.282,36.991 58.962,35.312 59.126,35.312 59.474,34.963 59.474,34.799 59.629,34.645 62.247,34.645 63.06,35.458 65.934,35.458 66.707,34.685 66.707,33.531 66.861,33.376 69.079,33.376 69.417,33.714 69.417,35.822 70.543,36.948 71.73,36.948 72.429,37.647 72.446,37.647 72.899,38.1 J4.3
USB_D_N: ?.8 IC1.32 J5.2 | length 47.8
  Top Layer w0.178: ?.8 46.733,29.21 46.838,29.314 46.838,30.579 46.733,30.683 32.767,30.683 29.502,33.947 28.442,35.008 28.442,35.554 28.62,35.732 29.535,36.647 30.265,37.376 30.767,37.376 30.828,37.438 31.587,37.438 J5.2 31.809,37.438 32.568,37.438 32.629,37.376 33.413,37.376 33.591,37.198 35.103,35.686 44.832,35.686 45.01,35.508 48.132,32.386 48.825,32.386 49.041,32.602 49.041,32.654 49.604,33.217 IC1.32
USB_D_P: ?.9 IC1.33 J5.3 R8.1 | length 57.7
  Top Layer w0.178: v1(30.226,35.687) 30.226,36.536 30.554,36.864 31.664,36.864 J5.3 ; ?.9 47.247,29.21 47.142,29.314 47.142,30.705 46.86,30.988 32.893,30.988 28.747,35.134 28.747,35.427 29.84,36.521 30.391,37.072 30.767,37.072 30.828,37.01 31.587,37.01 J5.3 ; IC1.33 49.871,32.949 49.308,32.386 49.256,32.386 48.951,32.082 48.005,32.082 44.706,35.381 34.977,35.381 33.286,37.072 32.629,37.072 32.568,37.01 31.809,37.01 J5.3
  Bottom Layer w0.178: v1(30.226,35.687) 30.226,36.449 30.607,36.83 32.253,36.83 35.417,33.666 R8.1
VBAT: IC1.1 J1.20 | length 25.6
  Top Layer w0.3: IC1.1 57.387,38.258 v1(58.618,37.028)
  Bottom Layer w0.3: v1(58.618,37.028) 58.618,36.974 59.082,36.51 59.082,36.319 60.016,35.386 67.707,35.386 70.915,38.593 70.915,40.058 71.729,40.872 71.729,41.335 72.711,42.317 73.174,42.317 73.562,42.705 74.455,42.705 J1.20
VCCIN: D3.1 J5.1 | length 17.8
  Top Layer w0.4: 29.21,38.199 J5.1
  Top Layer w1: v1(29.21,37.719) v1(29.21,38.481)
  Bottom Layer w0.5: v1(29.21,37.719) 32.639,37.719 35.306,35.052 D3.1
  Bottom Layer w1: v1(29.21,37.719) v1(29.21,38.481)
XTALA: C8.2 IC1.5 Y2.1 | length 12
  Top Layer w0.254: IC1.5 56.56,40.259 56.843,40.259 57.083,40.499 v1(57.15,40.499) ; v1(59.682,36.568) 59.287,36.173 59.287,35.963 59.436,35.814 60.882,35.814 Y2.1
  Bottom Layer w0.254: v1(57.15,40.499) 57.216,40.499 57.339,40.622 57.396,40.622 57.734,40.96 57.734,41.097 57.913,41.276 C8.2 59.103,41.276 59.356,41.023 59.356,40.495 59.905,39.946 59.905,36.791 v1(59.682,36.568)
XTALB: IC1.6 R7.2 | length 7
  Top Layer w0.254: IC1.6 55.257,39.65 56.759,41.152 57.11,41.152 v1(57.157,41.199)
  Bottom Layer w0.254: v1(57.157,41.199) 57.941,41.983 59.983,41.983 60.69,41.276 R7.2
XTALC: C6.2 IC1.3 J1.18 Y1.1 | length 26.5
  Top Layer w0.254: IC1.3 56.337,38.589 56.938,39.19 58.771,39.19 60.878,37.084 64.826,37.084 67.62,34.29 Y1.1@67.833,34.29 ; v1(67.31,36.322) 67.31,34.813 Y1.1@67.833,34.29 ; Y1.1 Y1.1@67.833,34.29
  Bottom Layer w0.254: v1(67.31,36.322) 67.934,36.946 68.337,36.946 68.914,37.523 68.914,39.243 69.167,39.496 C6.2 69.342,40.257 69.627,40.542 70.034,40.542 71.12,41.627 J1.18
XTALD: IC1.4 J1.17 R3.2 | length 7.8
  Top Layer w0.254: IC1.4 56.886,39.878 v1(57.658,39.878)
  Bottom Layer w0.254: R3.2 67.31,40.257 67.595,40.542 68.002,40.542 68.365,40.904 68.365,44.235 J1.17
pads on no net: J5.4 Y1.3 Y1.4

## Polygon pours and split planes (outlines as drawn)
no net on Top Layer "NONET_L01_P000" (solid, pour order 0): 25.273,48.387 78.867,48.387 78.867,25.273 25.273,25.273

## Silkscreen, mask and mechanical layers (free items; w line width, h text height)
Mechanical 1:
  the board outline again, w0.254